# EAGLE board OpenPMU (LEM) Motherboard V38 (Transformers) (Eagle 7) (EAGLE 9.0.1)
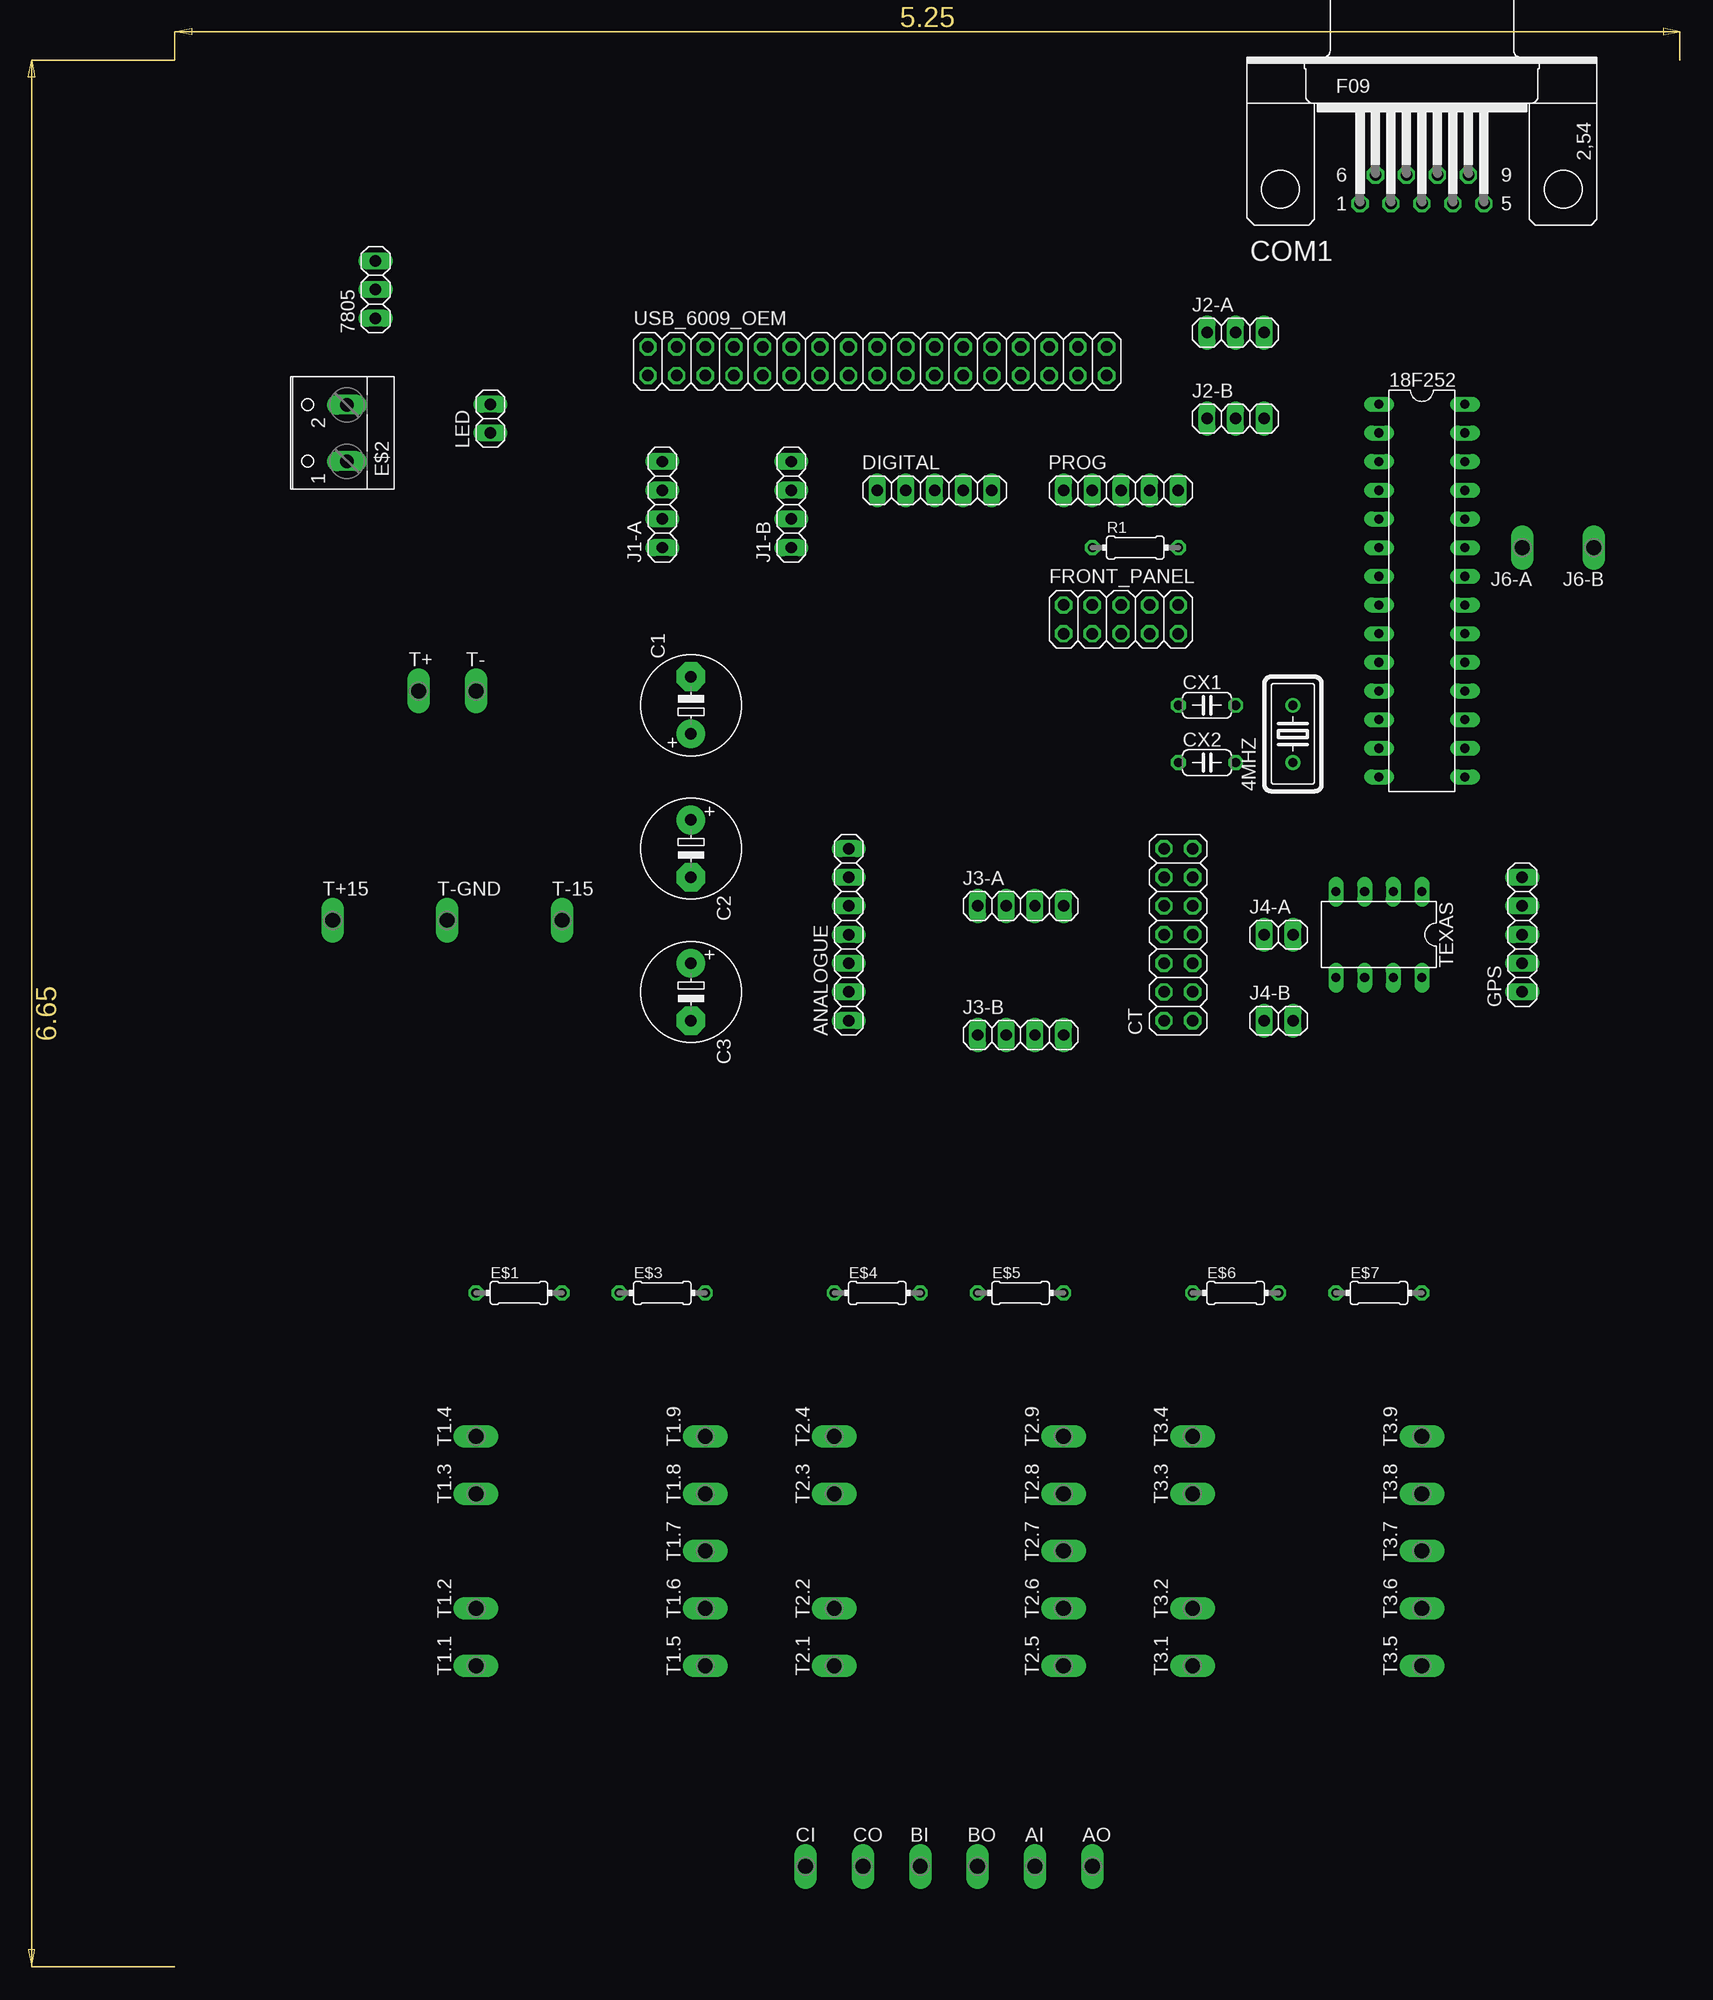
[diagram p0: board, top side]
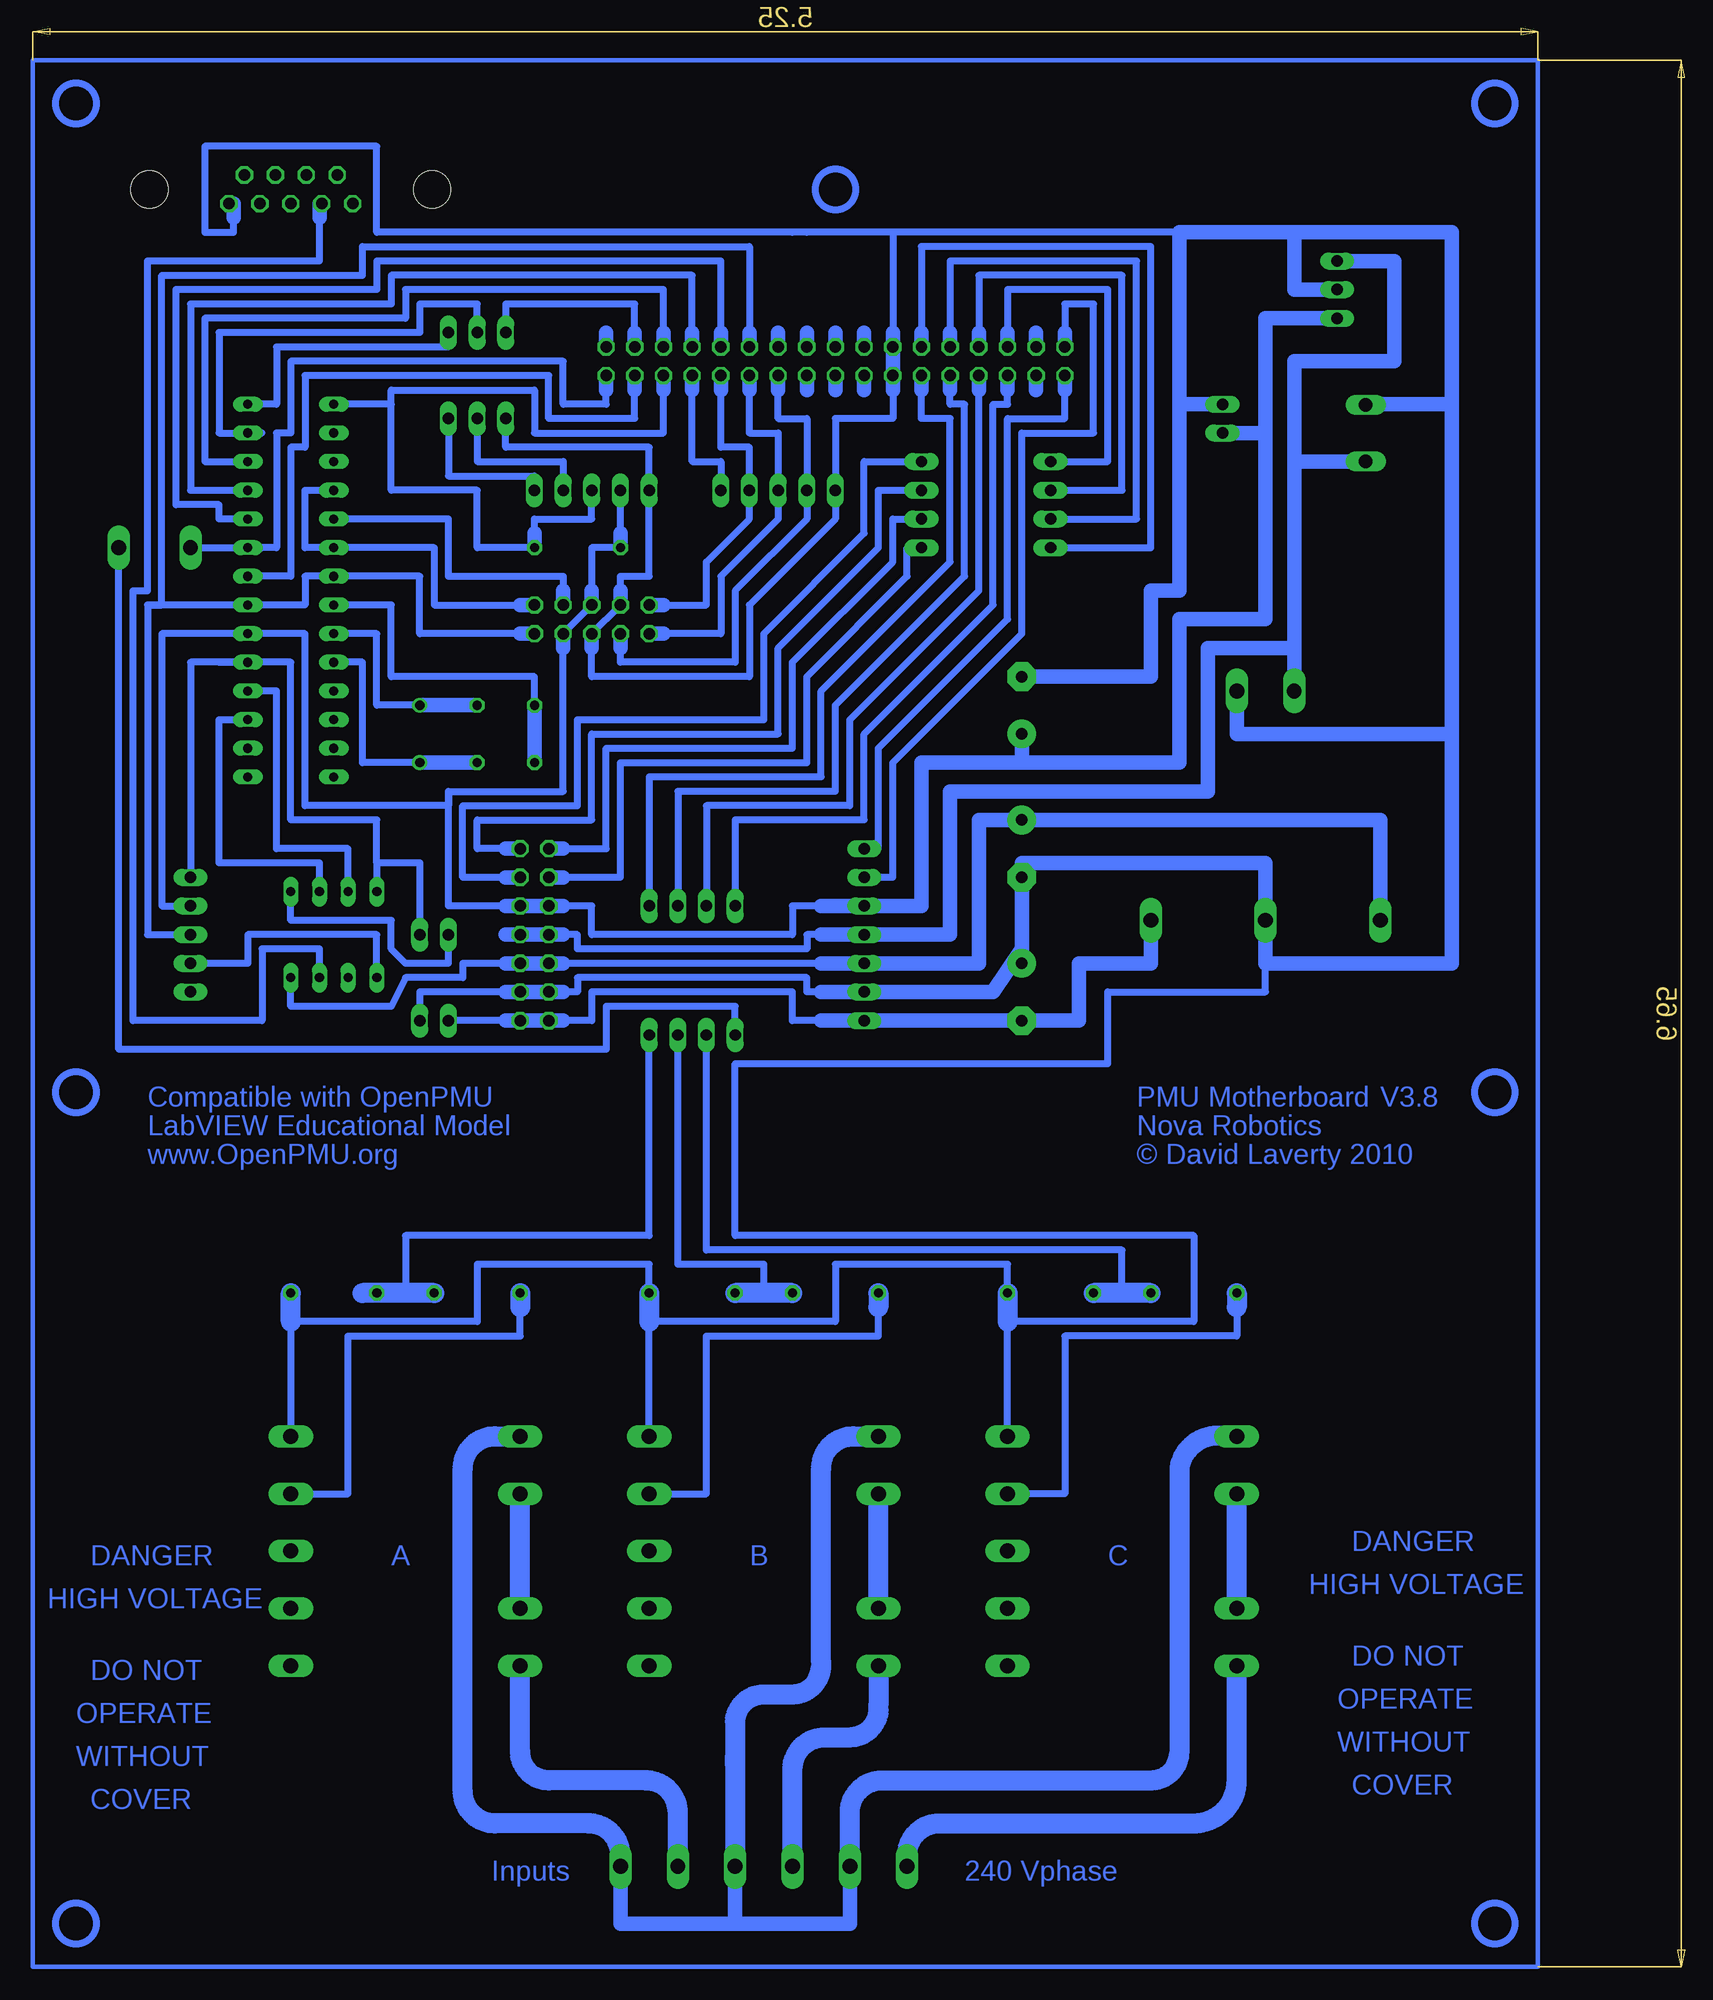
[diagram p1: board, bottom side, seen from below]

Size 146.35 x 171.75 mm. Coordinates in mm from the lower left corner, seen from the top.
Copper layers (1*16): Top 0.035mm / dielectric 1.5mm / Bottom 0.035mm
Design rules "default": minimum track width 10mil, minimum drill 24mil, track to track 8mil, track to pad 8mil, pad to pad 8mil, via to via 8mil, smd to smd 8mil, copper to edge 40mil, drill to drill 8mil, minimum pad ring 10mil, minimum via ring 8mil, stop-mask expansion 4mil, vias tented up to drill 0mil, thermal gap 10mil

## Footprints (pad centres in the part's own frame; a part is rotated, then mirrored left to right if it is on the bottom)
HC18U-V = drill 0.813: 1 -2.54,0; 2 2.54,0
DIL28-3 = drill 0.813 long: 1 -16.51,-3.81; 2 -13.97,-3.81; 3 -11.43,-3.81; 4 -8.89,-3.81; 5 -6.35,-3.81; 6 -3.81,-3.81; 7 -1.27,-3.81; 8 1.27,-3.81; 9 3.81,-3.81; 10 6.35,-3.81; 11 8.89,-3.81; 12 11.43,-3.81; 13 13.97,-3.81; 14 16.51,-3.81; 15 16.51,3.81; 16 13.97,3.81; 17 11.43,3.81; 18 8.89,3.81; 19 6.35,3.81; 20 3.81,3.81; 21 1.27,3.81; 22 -1.27,3.81; 23 -3.81,3.81; 24 -6.35,3.81; 25 -8.89,3.81; 26 -11.43,3.81; 27 -13.97,3.81; 28 -16.51,3.81
1X03 = drill 1.016 long: 1 -2.54,0; 2 0,0; 3 2.54,0
P1-13Y = drill 1.321 pad 1.905 long: 1 0,0
1X07 = drill 1.016 long: 1 -7.62,0; 2 -5.08,0; 3 -2.54,0; 4 0,0; 5 2.54,0; 6 5.08,0; 7 7.62,0
E5-8,5 = drill 1.016 pad 2.54: + -2.54,0 | drill 1.016 pad 2.54 octagon: - 2.54,0
F09H = drill 1.016 octagon: 1 -5.486,-1.27; 2 -2.743,-1.27; 3 0,-1.27; 4 2.743,-1.27; 5 5.486,-1.27; 6 -4.115,1.27; 7 -1.372,1.27; 8 1.372,1.27; 9 4.115,1.27 | hole 3.302: -12.522,0; 12.522,0
2X07 = drill 1.016 octagon: 1 -7.62,-1.27; 2 -7.62,1.27; 3 -5.08,-1.27; 4 -5.08,1.27; 5 -2.54,-1.27; 6 -2.54,1.27; 7 0,-1.27; 8 0,1.27; 9 2.54,-1.27; 10 2.54,1.27; 11 5.08,-1.27; 12 5.08,1.27; 13 7.62,-1.27; 14 7.62,1.27
C050-024X044 = drill 0.813 octagon: 1 -2.54,0; 2 2.54,0
1X05 = drill 1.016 long: 1 -5.08,0; 2 -2.54,0; 3 0,0; 4 2.54,0; 5 5.08,0
0204/7 = drill 0.813 octagon: 1 -3.81,0; 2 3.81,0
W237-102 = drill 1.194 long: 1 -2.5,-1.27; 2 2.5,-1.27
2X05 = drill 1.016 octagon: 1 -5.08,-1.27; 2 -5.08,1.27; 3 -2.54,-1.27; 4 -2.54,1.27; 5 0,-1.27; 6 0,1.27; 7 2.54,-1.27; 8 2.54,1.27; 9 5.08,-1.27; 10 5.08,1.27
1X04 = drill 1.016 long: 1 -3.81,0; 2 -1.27,0; 3 1.27,0; 4 3.81,0
1X02 = drill 1.016 long: 1 -1.27,0; 2 1.27,0
DIL08 = drill 0.813 long: 1 -3.81,-3.81; 2 -1.27,-3.81; 3 1.27,-3.81; 4 3.81,-3.81; 5 3.81,3.81; 6 1.27,3.81; 7 -1.27,3.81; 8 -3.81,3.81
2X17 = drill 1.016 octagon: 1 -20.32,-1.27; 2 -20.32,1.27; 3 -17.78,-1.27; 4 -17.78,1.27; 5 -15.24,-1.27; 6 -15.24,1.27; 7 -12.7,-1.27; 8 -12.7,1.27; 9 -10.16,-1.27; 10 -10.16,1.27; 11 -7.62,-1.27; 12 -7.62,1.27; 13 -5.08,-1.27; 14 -5.08,1.27; 15 -2.54,-1.27; 16 -2.54,1.27; 17 0,-1.27; 18 0,1.27; 19 2.54,-1.27; 20 2.54,1.27; 21 5.08,-1.27; 22 5.08,1.27; 23 7.62,-1.27; 24 7.62,1.27; 25 10.16,-1.27; 26 10.16,1.27; 27 12.7,-1.27; 28 12.7,1.27; 29 15.24,-1.27; 30 15.24,1.27; 31 17.78,-1.27; 32 17.78,1.27; 33 20.32,-1.27; 34 20.32,1.27

## Placement (x,y rotation side)
4MHZ  [HC18U-V]  112.06,109.22 90 top
18F252  [DIL28-3]  123.49,121.92 270 top
7805  [1X03]  30.78,148.59 90 top
AI  [P1-13Y]  89.2,8.89 0 top
ANALOGUE  [1X07]  72.69,91.44 90 top
AO  [P1-13Y]  94.28,8.89 0 top
BI  [P1-13Y]  79.04,8.89 0 top
BO  [P1-13Y]  84.12,8.89 0 top
C1  [E5-8,5]  58.72,111.76 90 top
C2  [E5-8,5]  58.72,99.06 270 top
C3  [E5-8,5]  58.72,86.36 270 top
CI  [P1-13Y]  68.88,8.89 0 top
CO  [P1-13Y]  73.96,8.89 0 top
COM1  [F09H]  123.49,157.48 0 top
CT  [2X07]  101.9,91.44 90 top
CX1  [C050-024X044]  104.44,111.76 0 top
CX2  [C050-024X044]  104.44,106.68 0 top
DIGITAL  [1X05]  80.31,130.81 0 top
E$1  [0204/7]  43.48,59.69 0 top
E$2  [W237-102]  26.97,135.89 90 top
E$3  [0204/7]  56.18,59.69 0 top
E$4  [0204/7]  75.23,59.69 0 top
E$5  [0204/7]  87.93,59.69 0 top
E$6  [0204/7]  106.98,59.69 0 top
E$7  [0204/7]  119.68,59.69 0 top
FRONT_PANEL  [2X05]  96.82,119.38 0 top
GPS  [1X05]  132.38,91.44 90 top
J1-A  [1X04]  56.18,129.54 90 top
J1-B  [1X04]  67.61,129.54 90 top
J2-A  [1X03]  106.98,144.78 0 top
J2-B  [1X03]  106.98,137.16 0 top
J3-A  [1X04]  87.93,93.98 0 top
J3-B  [1X04]  87.93,82.55 0 top
J4-A  [1X02]  110.79,91.44 0 top
J4-B  [1X02]  110.79,83.82 0 top
J6-A  [P1-13Y]  132.38,125.73 180 top
J6-B  [P1-13Y]  138.73,125.73 180 top
LED  [1X02]  40.94,137.16 90 top
PROG  [1X05]  96.82,130.81 0 top
R1  [0204/7]  98.09,125.73 0 top
T1.1  [P1-13Y]  39.67,26.67 90 top
T1.2  [P1-13Y]  39.67,31.75 90 top
T1.3  [P1-13Y]  39.67,41.91 90 top
T1.4  [P1-13Y]  39.67,46.99 90 top
T1.5  [P1-13Y]  59.99,26.67 90 top
T1.6  [P1-13Y]  59.99,31.75 90 top
T1.7  [P1-13Y]  59.99,36.83 90 top
T1.8  [P1-13Y]  59.99,41.91 90 top
T1.9  [P1-13Y]  59.99,46.99 90 top
T2.1  [P1-13Y]  71.42,26.67 90 top
T2.2  [P1-13Y]  71.42,31.75 90 top
T2.3  [P1-13Y]  71.42,41.91 90 top
T2.4  [P1-13Y]  71.42,46.99 90 top
T2.5  [P1-13Y]  91.74,26.67 90 top
T2.6  [P1-13Y]  91.74,31.75 90 top
T2.7  [P1-13Y]  91.74,36.83 90 top
T2.8  [P1-13Y]  91.74,41.91 90 top
T2.9  [P1-13Y]  91.74,46.99 90 top
T3.1  [P1-13Y]  103.17,26.67 90 top
T3.2  [P1-13Y]  103.17,31.75 90 top
T3.3  [P1-13Y]  103.17,41.91 90 top
T3.4  [P1-13Y]  103.17,46.99 90 top
T3.5  [P1-13Y]  123.49,26.67 90 top
T3.6  [P1-13Y]  123.49,31.75 90 top
T3.7  [P1-13Y]  123.49,36.83 90 top
T3.8  [P1-13Y]  123.49,41.91 90 top
T3.9  [P1-13Y]  123.49,46.99 90 top
T+  [P1-13Y]  34.59,113.03 0 top
T+15  [P1-13Y]  26.97,92.71 0 top
T-  [P1-13Y]  39.67,113.03 0 top
T-15  [P1-13Y]  47.29,92.71 0 top
T-GND  [P1-13Y]  37.13,92.71 0 top
TEXAS  [DIL08]  119.68,91.44 180 top
USB_6009_OEM  [2X17]  75.23,142.24 0 top

## Library data of the parts
4MHZ = crystal
18F252 TEXAS = ic-package
7805 ANALOGUE CT DIGITAL FRONT_PANEL GPS J1-A J1-B J2-A J2-B J3-A J3-B J4-A J4-B LED PROG USB_6009_OEM = pinhead
AI AO BI BO CI CO J6-A J6-B T1.1-T1.9 T2.1-T2.9 T3.1-T3.9 T+ T+15 T- T-15 T-GND = testpad
C1-C3 CX1 CX2 E$1 E$3-E$7 R1 = rcl
COM1 = con-subd
E$2 = con-wago-500

## Nets
AI0: J3-A.4 USB_6009_OEM.11
AI1: J3-A.3 USB_6009_OEM.9
AI2: J3-A.2 USB_6009_OEM.7
AI3: J3-A.1 USB_6009_OEM.5
AI4: J1-A.1 USB_6009_OEM.12
AI5: J1-A.2 USB_6009_OEM.10
AI6: J1-A.3 USB_6009_OEM.8
AI7: J1-A.4 USB_6009_OEM.6
GND2: 18F252.19 GPS.5 J4-A.2 TEXAS.4
GROUND: 7805.2 C3.+ E$7.2 FRONT_PANEL.4 FRONT_PANEL.5 J2-B.1 J4-B.2 LED.2 T3.9.1 USB_6009_OEM.13
S$1: 18F252.24 USB_6009_OEM.26
S$2: ANALOGUE.7 USB_6009_OEM.1
S$3: DIGITAL.5 USB_6009_OEM.27
S$4: 4MHZ.1 18F252.10
S$5: E$1.1 T1.8.1
S$6: 18F252.28
S$7: 4MHZ.2 18F252.9
S$8: 18F252.8
S$9: CI.1
S$10: T1.2.1 T1.3.1
S$11: J1-B.4
S$12: J1-B.3
S$13: J1-B.2
S$14: J1-B.1
S$15: T2.1.1
S$16: BI.1
S$17: T1.4.1
S$18: USB_6009_OEM.4
S$19: USB_6009_OEM.22
S$20: FRONT_PANEL.2 USB_6009_OEM.25
S$21: FRONT_PANEL.1 USB_6009_OEM.23
S$22: FRONT_PANEL.3 USB_6009_OEM.21
S$23: AI.1 T3.1.1
S$24: 18F252.25 USB_6009_OEM.28
S$25: 18F252.4 18F252.6 FRONT_PANEL.10
S$27: 18F252.21 FRONT_PANEL.9 GPS.3 USB_6009_OEM.24
S$28: T2.2.1 T2.3.1
S$30: GPS.2 TEXAS.5
S$31: TEXAS.7
S$32: ANALOGUE.6 USB_6009_OEM.2
S$33: 18F252.23 J6-A.1 USB_6009_OEM.33
S$34: 18F252.26 USB_6009_OEM.30
S$35: 18F252.18 TEXAS.3
S$36: AO.1 BO.1 CO.1 T3.4.1
S$37: 18F252.22 USB_6009_OEM.31
S$38: 18F252.5 FRONT_PANEL.8
S$39: J2-B.2 PROG.4
S$40: J2-B.3 PROG.5
S$41: 18F252.17 TEXAS.2
S$42: 18F252.1 PROG.3 USB_6009_OEM.29
S$43: USB_6009_OEM.3
S$44: USB_6009_OEM.16
S$45: J2-A.1 USB_6009_OEM.32
S$46: USB_6009_OEM.18
S$47: USB_6009_OEM.20
S$49: USB_6009_OEM.19
S$50: USB_6009_OEM.17
S$51: USB_6009_OEM.15
S$52: USB_6009_OEM.34
S$53: J3-B.1 J6-B.1
S$54: T2.4.1
S$55: E$3.2 T1.9.1
S$56: T+15.1 TEXAS.8
S$58: T3.2.1 T3.3.1
S$59: E$4.1
S$60: E$5.2 T2.9.1
S$61: E$6.1 T3.8.1
S$63: E$1.2 E$3.1 J3-B.2
S$64: E$4.2 E$5.1 J3-B.3
S$65: E$6.2 E$7.1 J3-B.4
V5V: 18F252.20 7805.1 C1.+ FRONT_PANEL.6 FRONT_PANEL.7 GPS.4 LED.1 PROG.2
V12V: 7805.3 T+.1
V-15: J4-B.1 T-15.1
V-15-2: J4-A.1 TEXAS.1

## Tracks (layer width: path | path; a pad name or v marks a point on that pad's centre or on a via)
AI0
  Bottom 0.61: J3-A.4 91.74,105.41 76.5,105.41 76.5,113.03 65.07,124.46 65.07,137.16 67.61,137.16 67.61,139.7
  Bottom 1.27: 67.61,139.7 USB_6009_OEM.11
AI1
  Bottom 0.61: J3-A.3 89.2,104.14 75.23,104.14 75.23,111.76 63.8,123.19 63.8,138.43 65.07,138.43 65.07,139.7
  Bottom 1.27: 65.07,139.7 USB_6009_OEM.9
AI2
  Bottom 0.61: 62.53,139.7 62.53,121.92 73.96,110.49 73.96,102.87 86.66,102.87 J3-A.2
  Bottom 1.27: 62.53,139.7 USB_6009_OEM.7
AI3
  Bottom 0.61: J3-A.1 84.12,101.6 72.69,101.6 72.69,109.22 61.26,120.65 61.26,138.43 59.99,138.43 59.99,139.7
  Bottom 1.27: 59.99,139.7 USB_6009_OEM.5
AI4
  Bottom 0.61: J1-A.1 47.29,125.73 47.29,152.4 67.61,152.4 67.61,144.78
  Bottom 1.27: USB_6009_OEM.12 67.61,144.78
AI5
  Bottom 0.61: 65.07,144.78 65.07,151.13 48.56,151.13 48.56,128.27 J1-A.2
  Bottom 1.27: USB_6009_OEM.10 65.07,144.78
AI6
  Bottom 0.61: J1-A.3 49.83,130.81 49.83,149.86 62.53,149.86 62.53,144.78
  Bottom 1.27: USB_6009_OEM.8 62.53,144.78
AI7
  Bottom 0.61: J1-A.4 51.1,133.35 51.1,148.59 59.99,148.59 59.99,144.78
  Bottom 1.27: USB_6009_OEM.6 59.99,144.78
CURRENT_HF
  Bottom 0.406: 146.35,0 146.35,168.91 13,168.91 13,0 146.35,0
GND2
  Bottom 0.61: GPS.5 132.38,115.57 129.84,115.57 | 129.84,115.57 18F252.19 | 129.84,115.57 123.49,115.57 123.49,101.6 115.87,101.6 115.87,97.79 | 115.87,97.79 TEXAS.4 | 115.87,97.79 112.06,97.79 J4-A.2
GROUND
  Bottom 0.61: J2-B.1 104.44,134.62 91.74,134.62 91.74,123.19 94.28,123.19 94.28,121.92 | FRONT_PANEL.5 FRONT_PANEL.4 | 96.82,116.84 96.82,114.3 82.85,114.3 82.85,120.65 75.23,128.27 75.23,137.16 70.15,137.16 70.15,139.7 USB_6009_OEM.13 | 128.57,154.94 128.57,153.67 131.11,153.67 131.11,161.29 115.87,161.29 115.87,153.67 77.77,153.67 | J4-B.2 112.06,86.36 103.17,86.36 | 100.63,86.36 98.09,86.36 98.09,87.63 77.77,87.63 77.77,86.36 76.5,86.36 | 70.15,153.67 70.15,144.78 | 70.15,153.67 77.77,153.67 | 77.77,153.67 79.04,153.67 | 43.48,153.67 70.15,153.67 | T3.9.1 123.49,57.15 106.98,57.15 106.98,62.23 91.74,62.23 91.74,57.15 75.23,57.15 75.23,62.23 59.99,62.23 59.99,57.15 43.48,57.15 43.48,64.77 84.12,64.77 84.12,80.01 51.1,80.01 51.1,86.36 37.13,86.36 37.13,88.9
  Bottom 1.27: 128.57,154.94 128.57,156.21 | FRONT_PANEL.4 94.28,121.92 | 96.82,116.84 FRONT_PANEL.5 | 104.44,86.36 103.17,86.36 100.63,86.36 99.36,86.36 | 58.72,114.3 47.29,114.3 47.29,121.92 44.75,121.92 44.75,138.43 | 44.75,138.43 LED.2 | USB_6009_OEM.13 70.15,144.78 70.15,139.7 | 44.75,138.43 44.75,153.67 43.48,153.67 34.59,153.67 | 7805.2 34.59,148.59 34.59,153.67 | 76.5,86.36 61.26,86.36 58.72,90.17 | 58.72,90.17 C3.+ | 34.59,153.67 20.62,153.67 20.62,138.43 | 39.67,114.3 39.67,109.22 20.62,109.22 | 20.62,138.43 28.24,138.43 | 58.72,90.17 58.72,97.79 37.13,97.79 37.13,92.71 | 20.62,109.22 20.62,138.43 | 20.62,109.22 20.62,88.9 37.13,88.9 37.13,92.71 | 37.13,92.71 37.13,91.44
  Bottom 1.778: 123.49,57.15 E$7.2
S$1
  Bottom 0.61: 18F252.24 129.84,128.27 129.84,129.54 133.65,129.54 133.65,148.59 115.87,148.59 115.87,151.13 85.39,151.13 85.39,144.78
  Bottom 1.27: USB_6009_OEM.26 85.39,144.78
S$2
  Bottom 0.61: 54.91,139.7 54.91,137.16 59.99,137.16 59.99,119.38 71.42,107.95 71.42,99.06 ANALOGUE.7
  Bottom 1.27: 54.91,139.7 USB_6009_OEM.1
S$3
  Bottom 0.61: USB_6009_OEM.27 87.93,133.35 85.39,133.35 DIGITAL.5
  Bottom 1.27: USB_6009_OEM.27 87.93,139.7
S$4
  Bottom 0.61: 18F252.10 117.14,115.57 117.14,106.68 4MHZ.1
  Bottom 1.27: 106.98,106.68 4MHZ.1
S$5
  Bottom 0.61: 39.67,58.42 39.67,55.88 54.91,55.88 54.91,41.91 T1.8.1
  Bottom 1.778: E$1.1 39.67,58.42
S$6
  Bottom 0.61: 18F252.28 124.76,138.43 124.76,143.51 109.52,143.51 109.52,144.78
S$7
  Bottom 0.61: 4MHZ.2 115.87,111.76 115.87,118.11 18F252.9
  Bottom 1.27: 106.98,111.76 4MHZ.2
S$8
  Bottom 0.61: 101.9,111.76 101.9,114.3 114.6,114.3 114.6,120.65 18F252.8
  Bottom 1.27: 101.9,106.68 101.9,111.76
S$9
  Bottom 1.778: CI.1 68.88,9.86 arc90 66.04,12.7 43.48,12.7 arc-90 39.67,16.51 39.67,26.67
S$10
  Bottom 1.778: T1.2.1 T1.3.1
S$11
  Bottom 0.61: 104.44,96.52 108.25,96.52 108.25,102.87 98.09,102.87 98.09,110.49 81.58,110.49 81.58,118.11 72.69,127 72.69,133.35 J1-B.4
  Bottom 1.27: 104.44,96.52 103.17,96.52
S$12
  Bottom 0.61: J1-B.3 71.42,130.81 71.42,125.73 80.31,116.84 80.31,109.22 96.82,109.22 96.82,101.6 106.98,101.6 106.98,99.06 104.44,99.06
  Bottom 1.27: 104.44,99.06 103.17,99.06
S$13
  Bottom 0.61: 99.36,99.06 95.55,99.06 95.55,107.95 79.04,107.95 79.04,115.57 70.15,124.46 70.15,128.27 J1-B.2
  Bottom 1.27: 99.36,99.06 100.63,99.06
S$14
  Bottom 0.61: 99.36,96.52 94.28,96.52 94.28,106.68 77.77,106.68 77.77,114.3 68.88,123.19 68.88,125.73 J1-B.1
  Bottom 1.27: 99.36,96.52 100.63,96.52
S$15
  Bottom 1.778: T2.1.1 71.42,23.16
S$16
  Bottom 1.778: 71.42,22.86 arc90 73.96,20.32 76.2,20.32 arc-90 79.04,17.48 BI.1
S$17
  Bottom 1.778: T1.4.1 40.73,46.99 arc-90 44.75,44.24 44.75,19.05
S$18
  Bottom 1.27: USB_6009_OEM.4 57.45,144.78
S$19
  Bottom 1.27: USB_6009_OEM.22 80.31,144.78
S$20
  Bottom 0.61: 85.39,139.7 85.39,134.62 82.85,134.62 82.85,128.27 86.66,124.46 86.66,120.65 90.47,120.65
  Bottom 1.27: 85.39,139.7 USB_6009_OEM.25 | FRONT_PANEL.2 90.47,120.65
S$21
  Bottom 0.61: USB_6009_OEM.23 82.85,135.89 80.31,135.89 80.31,128.27 85.39,123.19 85.39,118.11 90.47,118.11
  Bottom 1.27: USB_6009_OEM.23 82.85,139.7 | FRONT_PANEL.1 90.47,118.11
S$22
  Bottom 0.61: USB_6009_OEM.21 80.31,137.16 77.77,137.16 77.77,128.27 84.12,121.92 84.12,115.57 94.28,115.57 94.28,116.84
  Bottom 1.27: USB_6009_OEM.21 80.31,139.7 | FRONT_PANEL.3 94.28,116.84
S$23
  Bottom 1.778: AI.1 89.2,13.67 arc-90 92.04,16.51 100.63,16.51 arc90 103.17,19.05 T3.1.1
S$24
  Bottom 0.61: USB_6009_OEM.28 87.93,149.86 114.6,149.86 114.6,147.32 132.38,147.32 132.38,130.81 18F252.25
  Bottom 1.27: USB_6009_OEM.28 87.93,144.78
S$25
  Bottom 0.61: 103.17,120.65 110.79,120.65 110.79,125.73 18F252.6 122.22,125.73 122.22,130.81 18F252.4
  Bottom 1.27: FRONT_PANEL.10 103.17,120.65
S$26
  Bottom 0.61: 106.98,144.78 106.98,147.32 112.06,147.32 112.06,144.78 129.84,144.78 129.84,135.89 126.03,135.89
S$27
  Bottom 0.61: 136.19,120.65 134.92,120.65 134.92,149.86 117.14,149.86 117.14,152.4 82.85,152.4 82.85,144.78 | 136.19,120.65 18F252.21 122.22,120.65 122.22,123.19 112.06,123.19 112.06,118.11 103.17,118.11 | 136.19,120.65 136.19,91.44 GPS.3
  Bottom 1.27: 82.85,144.78 USB_6009_OEM.24 | FRONT_PANEL.9 103.17,118.11
S$28
  Bottom 1.778: T2.2.1 T2.3.1
S$30
  Bottom 0.61: GPS.2 127.3,88.9 127.3,91.44 115.87,91.44 TEXAS.5
S$31
  Bottom 0.61: 120.95,154.94 120.95,151.13 136.19,151.13 136.19,121.92 137.46,121.92 137.46,83.82 126.03,83.82 126.03,90.17 120.95,90.17 TEXAS.7
  Bottom 1.27: 120.95,154.94 120.95,156.21
S$32
  Bottom 0.61: 54.91,144.78 54.91,147.32 52.37,147.32 52.37,135.89 58.72,135.89 58.72,118.11 70.15,106.68 70.15,96.52 ANALOGUE.6
  Bottom 1.27: 54.91,144.78 USB_6009_OEM.2
S$33
  Bottom 0.61: USB_6009_OEM.33 95.55,138.43 99.36,138.43 99.36,142.24 123.49,142.24 123.49,135.89 124.76,135.89 124.76,125.73 126.03,125.73 | 126.03,125.73 18F252.23 | J6-A.1 126.03,125.73
  Bottom 1.27: USB_6009_OEM.33 95.55,139.7
S$34
  Bottom 0.61: USB_6009_OEM.30 90.47,148.59 113.33,148.59 113.33,146.05 131.11,146.05 131.11,133.35 18F252.26
  Bottom 1.27: USB_6009_OEM.30 90.47,144.78
S$35
  Bottom 0.61: 18F252.18 124.76,113.03 124.76,99.06 118.41,99.06 TEXAS.3
S$36
  Bottom 1.27: AO.1 94.28,3.81 84.12,3.81 | CO.1 73.96,3.81 84.12,3.81 | BO.1 84.12,3.81
  Bottom 1.778: 44.75,19.05 arc90 47.29,16.51 71.12,16.51 arc-90 73.96,13.67 CO.1 | T3.4.1 105.41,46.99 arc-90 108.25,44.15 108.25,15.54 arc-90 105.41,12.7 97.12,12.7 arc90 94.28,9.86 AO.1 | 84.12,17.78 BO.1 | 84.12,17.78 84.12,18.75 | 84.12,21.29 84.12,17.78
S$37
  Bottom 0.61: 18F252.22 123.49,123.19 123.49,134.62 122.22,134.62 122.22,140.97 100.63,140.97 100.63,137.16 93.01,137.16 93.01,139.7
  Bottom 1.27: 93.01,139.7 USB_6009_OEM.31
S$38
  Bottom 0.61: 18F252.5 109.52,128.27 109.52,123.19 99.36,123.19 99.36,121.92
  Bottom 1.27: FRONT_PANEL.8 99.36,121.92
S$39
  Bottom 0.61: J2-B.2 106.98,133.35 99.36,133.35 PROG.4
S$40
  Bottom 0.61: J2-B.3 109.52,132.08 101.9,132.08 PROG.5
S$41
  Bottom 0.61: 18F252.17 129.84,110.49 129.84,97.79 120.95,97.79 TEXAS.2
S$42
  Bottom 0.61: 101.9,127 101.9,128.27 96.82,128.27 PROG.3 | 114.6,138.43 18F252.1 | 114.6,138.43 114.6,130.81 106.98,130.81 106.98,125.73 101.9,125.73 | 114.6,138.43 114.6,139.7 101.9,139.7 101.9,135.89 90.47,135.89 90.47,139.7
  Bottom 1.27: 90.47,139.7 USB_6009_OEM.29 | 101.9,125.73 101.9,127
S$43
  Bottom 1.27: USB_6009_OEM.3 57.45,139.7
S$44
  Bottom 1.27: USB_6009_OEM.16 72.69,144.78
S$45
  Bottom 0.61: 93.01,144.78 93.01,147.32 96.82,147.32 | J2-A.1 104.44,147.32 96.82,147.32 | 95.55,147.32 96.82,147.32
  Bottom 1.27: USB_6009_OEM.32 93.01,144.78
S$46
  Bottom 1.27: USB_6009_OEM.18 75.23,144.78
S$47
  Bottom 1.27: USB_6009_OEM.20 77.77,144.78
S$49
  Bottom 1.27: USB_6009_OEM.19 77.77,139.7
S$50
  Bottom 1.27: USB_6009_OEM.17 75.23,139.7
S$51
  Bottom 1.27: USB_6009_OEM.15 72.69,139.7
S$52
  Bottom 1.27: USB_6009_OEM.34 95.55,144.78
S$53
  Bottom 0.61: J6-B.1 138.73,81.28 95.55,81.28 95.55,85.09 84.12,85.09 J3-B.1
S$54
  Bottom 1.778: T2.4.1 73.66,46.99 arc-90 76.5,44.15 76.5,26.97
S$55
  Bottom 0.61: T1.9.1 59.99,57.15 59.99,58.42
  Bottom 1.778: 59.99,58.42 E$3.2 59.99,57.15
S$56
  Bottom 0.61: TEXAS.8 123.49,85.09 114.6,85.09 113.33,87.63 108.25,87.63 108.25,88.9 104.44,88.9 | 76.5,88.9 99.36,88.9
  Bottom 1.27: 99.36,88.9 104.44,88.9 | 76.5,88.9 62.53,88.9 62.53,101.6 26.97,101.6 T+15.1
S$57
  Bottom 1.778: 84.12,21.59 arc90 81.58,24.13 79.04,24.13 arc-90 76.5,26.67
S$58
  Bottom 1.778: T3.2.1 T3.3.1
S$59
  Bottom 0.61: 90.47,41.91 86.66,41.91 86.66,55.88 71.42,55.88 71.42,58.42
  Bottom 1.778: E$4.1 71.42,58.42
S$60
  Bottom 0.61: T2.9.1 91.74,57.15
  Bottom 1.778: E$5.2 91.74,57.15
S$61
  Bottom 0.61: T3.8.1 118.41,41.91 118.41,55.88 103.17,55.88 103.17,58.42
  Bottom 1.778: E$6.1 103.17,58.42
S$63
  Bottom 0.61: 49.83,59.69 E$1.2 | 49.83,59.69 E$3.1 | 49.83,59.69 49.83,63.5 86.66,63.5 J3-B.2
  Bottom 1.778: E$1.2 E$3.1
S$64
  Bottom 0.61: E$4.2 81.58,59.69 | 81.58,59.69 E$5.1 | 81.58,59.69 81.58,62.23 89.2,62.23 J3-B.3
  Bottom 1.778: E$4.2 E$5.1
S$65
  Bottom 0.61: 113.33,59.69 E$6.2 | 113.33,59.69 E$7.1 | J3-B.4 91.74,64.77 113.33,64.77 113.33,59.69
  Bottom 1.778: E$6.2 117.14,59.69
V5V
  Bottom 0.61: GPS.4 134.92,93.98 134.92,118.11 18F252.20 122.22,118.11 122.22,102.87 109.52,102.87 109.52,104.14 | FRONT_PANEL.7 FRONT_PANEL.6 | 99.36,116.84 99.36,104.14 109.52,104.14 | 109.52,104.14 109.52,93.98 104.44,93.98 | 99.36,93.98 96.82,93.98 96.82,91.44 79.04,91.44 79.04,93.98 76.5,93.98 | 94.28,127 PROG.2 | 94.28,125.73 96.82,125.73 96.82,121.92
  Bottom 1.27: FRONT_PANEL.6 96.82,121.92 | 99.36,116.84 FRONT_PANEL.7 | 99.36,93.98 104.44,93.98 | 7805.1 37.13,146.05 37.13,135.89 | 37.13,135.89 LED.1 | 76.5,93.98 67.61,93.98 67.61,106.68 58.72,106.68 | 37.13,135.89 37.13,119.38 44.75,119.38 44.75,106.68 58.72,106.68 | 58.72,106.68 C1.+ | 94.28,125.73 94.28,127
V12V
  Bottom 0.61: 76.5,91.44 77.77,91.44 77.77,90.17 98.09,90.17 98.09,91.44 99.36,91.44
  Bottom 1.27: 76.5,91.44 65.07,91.44 65.07,104.14 42.21,104.14 42.21,116.84 34.59,116.84 | 7805.3 25.7,151.13 25.7,142.24 34.59,142.24 34.59,133.35 | 34.59,133.35 28.24,133.35 | 34.59,116.84 34.59,133.35 | T+.1 34.59,116.84 | 99.36,91.44 104.44,91.44
V-15
  Bottom 0.61: 104.44,83.82 J4-B.1 | 100.63,83.82 96.82,83.82 96.82,86.36 79.04,86.36 79.04,83.82 76.5,83.82
  Bottom 1.27: 104.44,83.82 100.63,83.82 99.36,83.82 | T-15.1 47.29,88.9 53.64,88.9 53.64,83.82 76.5,83.82
V-15-2
  Bottom 0.61: TEXAS.1 123.49,92.71 114.6,92.71 114.6,90.17 113.33,88.9 109.52,88.9 J4-A.1
(copper drawn outside any net)
  shapes: Bottom circle x7

## Text on the board
Bottom: V3.8 | PMU Motherboard | Compatible with OpenPMU | Nova Robotics | LabVIEW Educational Model | © David Laverty 2010 | www.OpenPMU.org | DANGER | C | B | A | DANGER | HIGH VOLTAGE | HIGH VOLTAGE | DO NOT | DO NOT | OPERATE | OPERATE | WITHOUT | WITHOUT | COVER | COVER | 240 Vphase | Inputs